# Altium PCB WeatherStation.PcbDoc
Units mil, origin at the board's own origin, x right, y up, seen from the top; angles counter-clockwise.
Board outline 2700 x 2100 mil, 2 copper layers (Top Layer, Bottom Layer); 19 components, 47 nets, 86 pads, 0 vias.
Unrouted connection lines stored in the file: 6.
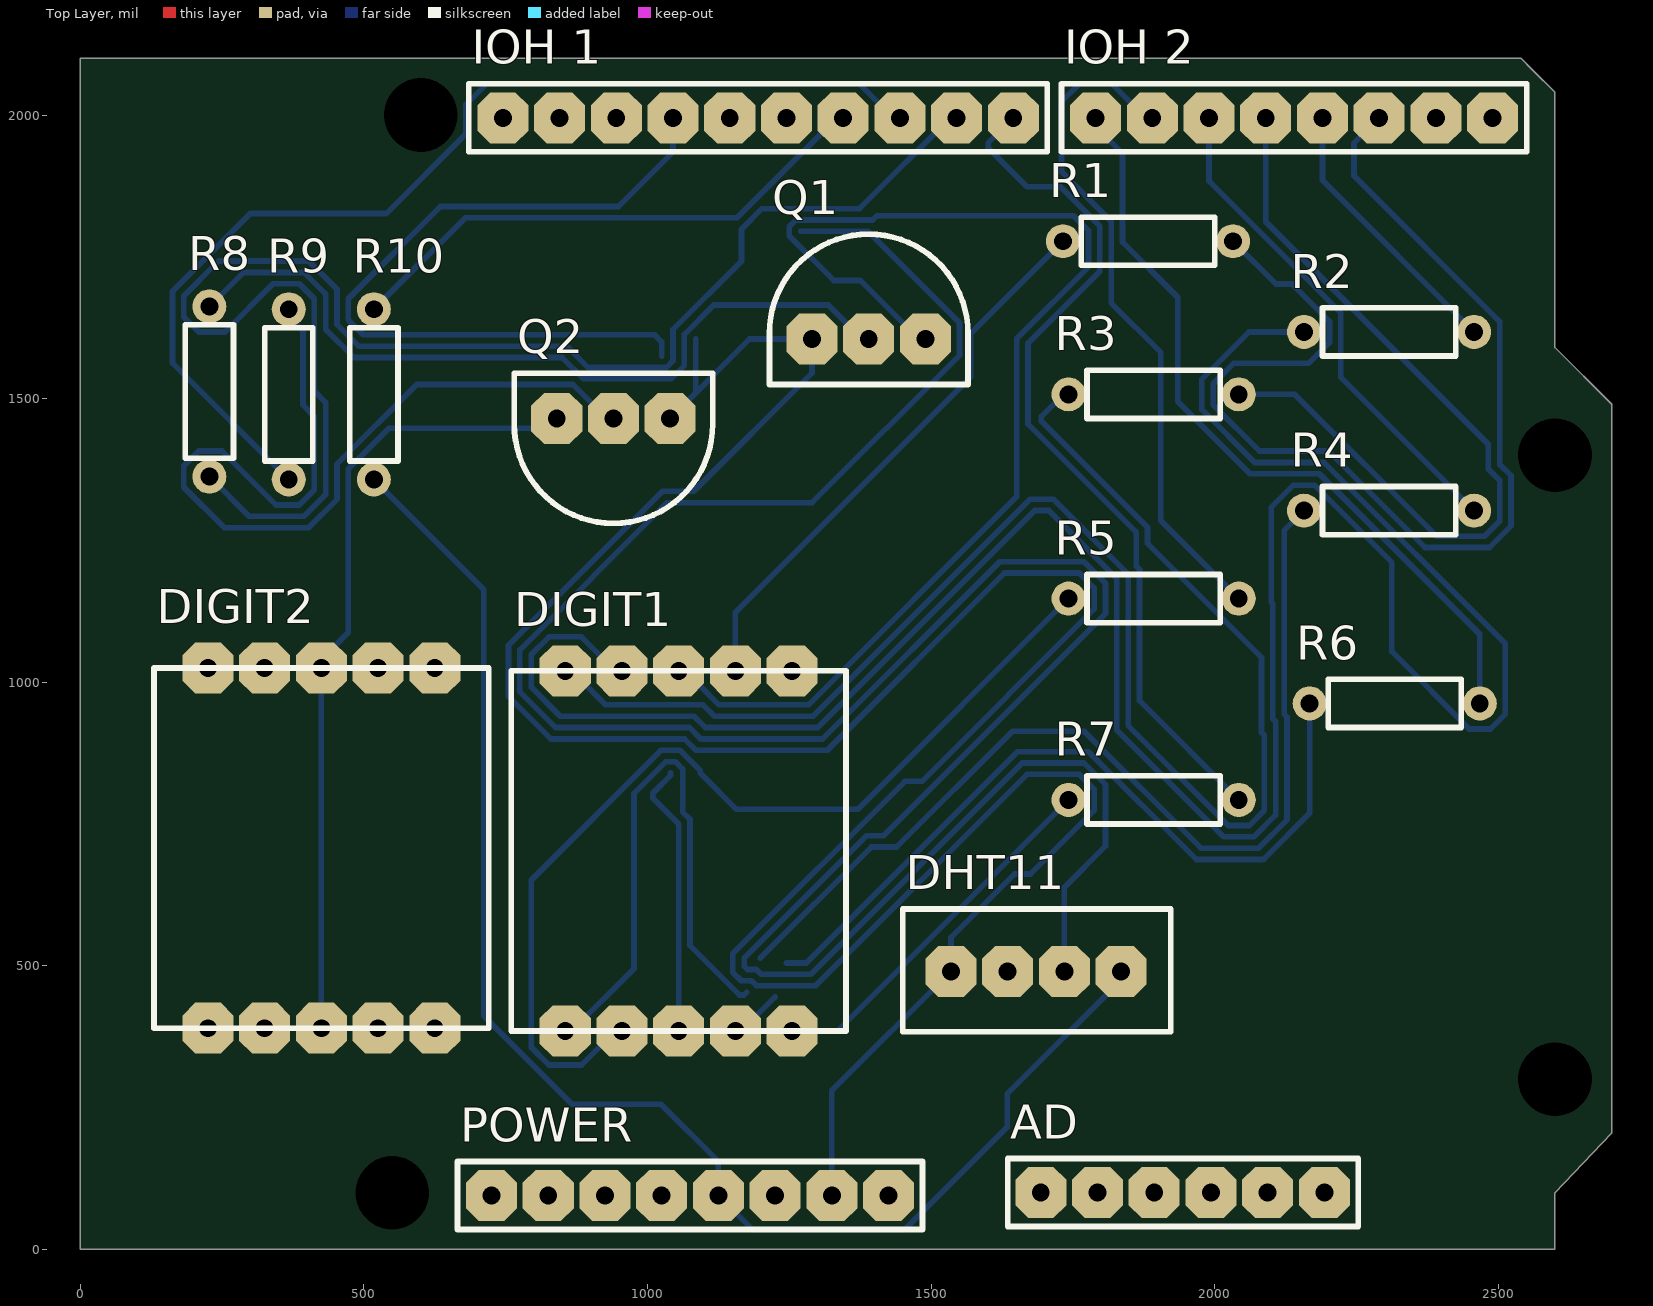
[diagram p0: Top Layer view]
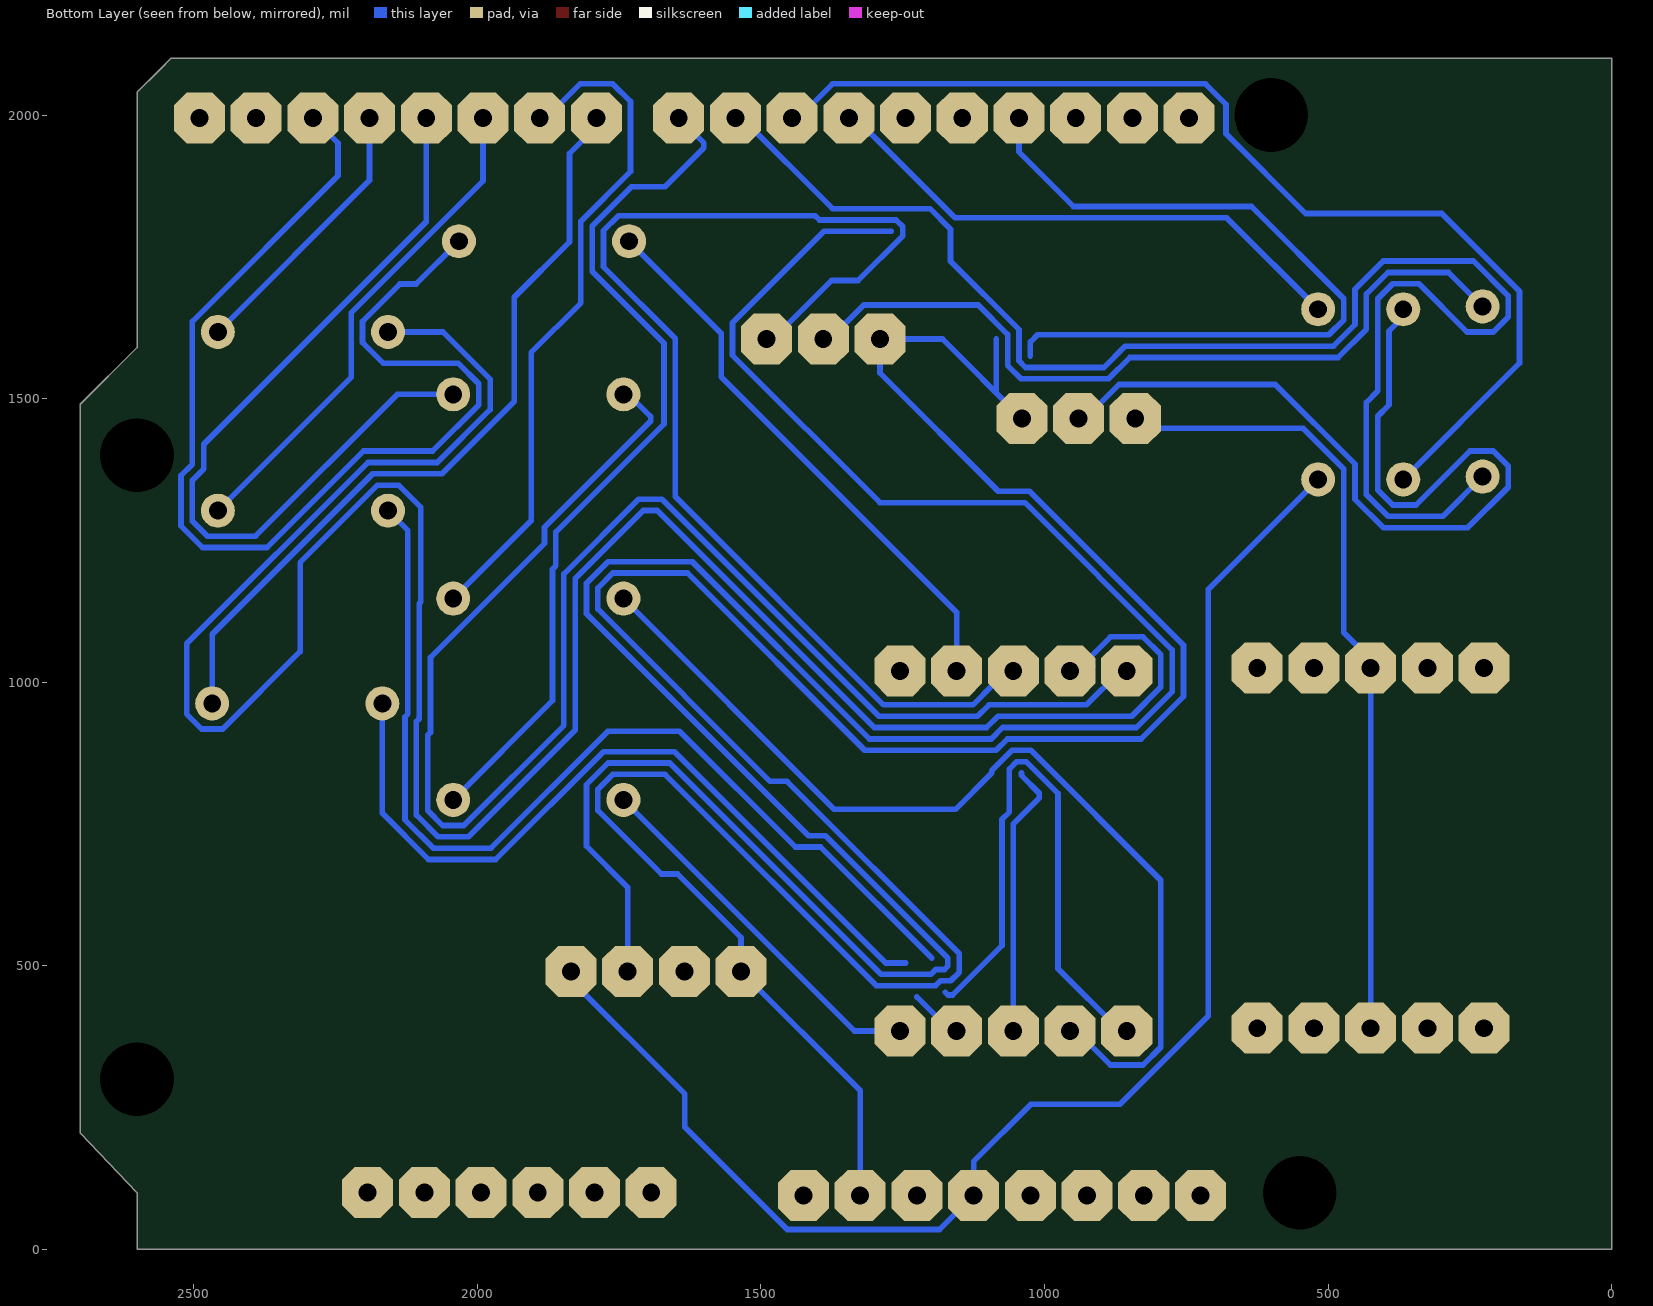
[diagram p1: Bottom Layer view, seen from below]

## Layer stack, top to bottom
Top Solder: solder mask 0.4, Solder Resist, Dk 3.5
Top Layer: signal copper 1.4
Dielectric 1: dielectric 12.6, FR-4, Dk 4.8
Bottom Layer: signal copper 1.4
Bottom Solder: solder mask 0.4, Solder Resist, Dk 3.5

## Board outline
2700,1490 2600,1590 2600,2040 2560,2080 2540,2100 0,2100 0,0 2600,0 2600,100 2700,205

## Design rules (kind name [scope] priority, off if disabled: settings)
Clearance [All] p1: gap=10 ignorepadtopadclearanceinfootprint=FALSE except(0: Arc-Hole Track-Hole SMDPad-Hole THPad-Hole Via-Hole Fill-Hole Poly-Hole Region-Hole Text-Hole)
PolygonConnect [All] p1: connectstyle=Relief reliefconductorwidth=10 reliefentries=4 polygonreliefangle="90 Angle" airgapwidth=10
RoutingVias [All] p1: holewidth=28 width=50 viastyle="Through Hole" minholewidth=28 minwidth=50 maxholewidth=28 maxwidth=50
SolderMaskExpansion [All] p1: expansion=4 istentingtop=FALSE
Width [All] p1: maxlimit=10 minlimit=10 preferedwidth=10
30 further rules are at their usual default settings.

## Classes and differential pairs
component class WeatherStation: AD DIGIT1 DIGIT2 "IOH 1" "IOH 2" POWER Q1 Q2 R1 R2 R3 R4 R5 R6 R7 R8 R9 R10

## Components (designator, comment, footprint, x,y, rotation, side; value= is the part's Value field where it differs from the comment)
AD "AD" AD 1895,100 r90 top
DHT11 "DHT11" DHT11 1685,495 r180 top
DIGIT1 "LTS543R" 7SEGMENT 1060,705 r0 top
DIGIT2 "LTS543R" 7SEGMENT 430,710 r0 top
"IOH 1" "IOH 1" "IOH 1" 1245,1995 r90 top
"IOH 2" "IOH 2" "IOH 2" 2075,2000 r90 top
POWER "POWER" POWER 1005,95 r90 top
Q1 "Transistor" TRANSISTOR 1390,1615 r0 top
Q2 "Transistor" TRANSISTOR 940,1455 r180 top
R1 "Resistor 330" RESISTOR 1885,1775 r180 top
R2 "Resistor 330" RESISTOR 2310,1615 r180 top
R3 "Resistor 330" RESISTOR 1895,1505 r180 top
R4 "Resistor 330" RESISTOR 2310,1300 r180 top
R5 "Resistor 330" RESISTOR 1895,1145 r180 top
R6 "Resistor 330" RESISTOR 2320,960 r180 top
R7 "Resistor 330" RESISTOR 1895,790 r180 top
R8 "Resistor 4.7k" RESISTOR 225,1510 r90 top
R9 "Resistor 4.7k" RESISTOR 365,1505 r90 top
R10 "Resistor 4.7k" RESISTOR 520,1510 r270 top

## Footprints (in the part's own frame and the unit in brackets; to place one, negate y for a bottom-side part, rotate by r counter-clockwise, add the part's x,y. Pads: shape width x height; smd on the part's side, far side on the other; paste and mask are expansions set on the pad)
7SEGMENT [mil]
  oct 90x90 hole 31.5: 1(-205,315) 2(-105,315) 3(-5,315) 4(95,315) 5(195,315) 6(-205,-320) 7(-105,-320) 8(-5,-320) 9(95,-320) 10(195,-320)
  silkscreen extent -300,-320 290,315
AD [mil]
  oct 90x90 hole 31.5: 1(0.33,201.57) 2(0.33,101.57) 3(0.33,1.57) 4(0.33,-98.43) 5(0.33,-198.43) 6(0.33,-298.43)
  silkscreen extent -60,-358 60,260
DHT11 [mil]
  oct 90x90 hole 31.5: 1(-150,5) 2(-50,5) 3(50,5) 4(150,5)
  silkscreen extent -237,-105 235,112
"IOH 1" [mil]
  oct 90x90 hole 31.5: 1(0,-400) 2(0,-300) 3(0,-200) 4(0,-100) 5(0,0) 6(0,100) 7(0,200) 8(0,300) 9(0,400) 10(0,500)
  silkscreen extent -60,-460 60,560
"IOH 2" [mil]
  oct 90x90 hole 31.5: 1(-5,-415) 2(-5,-315) 3(-5,-215) 4(-5,-115) 5(-5,-15) 6(-5,85) 7(-5,185) 8(-5,285)
  silkscreen extent -65,-475 55,345
POWER [mil]
  oct 90x90 hole 31.5: 1(0,-420) 2(0,-320) 3(0,-220) 4(0,-120) 5(0,-20) 6(0,80) 7(0,180) 8(0,280)
  silkscreen extent -60,-480 60,340
RESISTOR [mil]
  round 60 hole 31.5: 1(-147.5,-2.5) 2(152.5,-2.5)
  silkscreen extent -115,-45 120,40
TRANSISTOR [mil]
  oct 90x90 hole 31.5: 5(-100,-10) 6(0,-10) 7(100,-10)
  silkscreen extent -175,-90 175,175

## Free pads (board coordinates)
  round 90 hole 129.92: 1(2600,1400) 2(2600,300) 3(550,100) 4(600,2000)

## Nets (pads, with @x,y where several pads share a name; then routed paths per layer and width w, separated by ;. In a path a pad name is that pad's centre, name@x,y a point inside that pad or via, vN(x,y) a via of type N, cw(c..) or ccw(c..) an arc to the next point about the centre after c; other vN are vias at no path point)
3V3: POWER.5
5V: DHT11.1 POWER.4 R10.2 | length 2572.6
  Bottom Layer w10: R10.2 711.36,1163.64 711.36,411.65 867.36,255.64 1024.36,255.64 1125,155 POWER.4 1185,35 1453.71,35 1634.14,215.43 1634.14,273.71 1835,474.57 DHT11.1
a: DIGIT2.7
AD0: AD.1
AD1: AD.2
AD2: AD.3
AD3: AD.4
AD4: AD.5
AD5: AD.6
AREF: "IOH 1.8"
b: DIGIT2.6
c: DIGIT2.4
d: DIGIT2.2
e: DIGIT2.1
f: DIGIT2.9
g: DIGIT2.10
GND: "IOH 1.7" DHT11.4 POWER.2 POWER.3 Q1.5 Q2.5 | length 6629.2
  Bottom Layer w10: 1025,1575 1025,1600 1012.5,1612.5 498.86,1612.5 472.5,1638.86 472.5,1676.14 635.11,1838.75 948.75,1838.75 1045,1935 1045,1995 ; 1085,1605 1085,1510 Q2.5 1180,1605 Q1.5 1290,1545 1081.64,1336.64 1026.36,1336.64 755,1065.28 755,974.72 829.72,900 1065.53,900 1085.53,880 1316.85,880 1629.35,1192.5 1761.14,1192.5 1787.5,1166.14 1787.5,1128.86 1483.85,825.21 1454.05,825.21 1150.4,521.57 1150.4,488.43 1165.33,473.5 1183.5,473.5 1192,465 1296.57,465 1669.07,837.5 1761.14,837.5 1787.5,811.14 1787.5,773.86 1675.57,661.93 1646.93,661.93 1535,550 DHT11.4 1325,280 POWER.2
IO0: "IOH 2.1"
IO1: "IOH 2.2"
IO2: "IOH 2.3" R1.1 | length 2035.6
  Bottom Layer w10: R1.1 2107.96,1702.04 2136.6,1702.04 2202.5,1636.14 2202.5,1598.86 2166.14,1562.5 2033.86,1562.5 1997.5,1526.14 1997.5,1488.86 2078.86,1407.5 2200.99,1407.5 2370.99,1237.5 2484.42,1237.5 2522.5,1275.58 2522.5,1364.42 2502.5,1384.42 2502.5,1636.14 2245.64,1893 2245.64,1950.64 2290,1995
IO3: "IOH 2.4" R2.1 | length 488.3
  Bottom Layer w10: 2190,1995 2190,1885 R2.1
IO4: "IOH 2.5" R3.1 | length 1456.5
  Bottom Layer w10: R3.1 2141.08,1507.5 2391.08,1257.5 2476.14,1257.5 2502.5,1283.86 2502.5,1356.13 2482.5,1376.13 2482.5,1419.42 2090,1811.92 2090,1995
IO5: "IOH 2.6" R4.1 | length 886.1
  Bottom Layer w10: 1990,1995 1990,1883.64 2222.5,1651.14 2222.5,1537.5 R4.1
IO6: "IOH 2.7" R5.1 | length 1203.5
  Bottom Layer w10: 1890,1995 1878.71,1995 1818.71,2055 1761.29,2055 1730,2023.71 1730,1900.21 1817.5,1812.71 1817.5,1668.86 1905.22,1581.14 1905.22,1284.78 R5.1
IO7: "IOH 2.8" R6.1 | length 1384.7
  Bottom Layer w10: 1790,1995 1790,1979.57 1837.5,1932.07 1837.5,1776.14 1934.9,1678.74 1934.9,1494.9 2062.29,1367.5 2184.42,1367.5 2467.5,1084.42 R6.1
IO8: "IOH 1.1" R7.1 | length 1543.2
  Bottom Layer w10: 1645,1995 1600.64,1950.64 1600.64,1942.36 1669.61,1873.39 1728.53,1873.39 1797.5,1804.42 1797.5,1724.07 1671,1597.57 1671,1455.36 1861.57,1264.79 1861.57,1205.2 1867.5,1199.28 1867.5,967.5 R7.1
IO9: "IOH 1.2" R8.1 | length 2677.4
  Bottom Layer w10: R8.1 297.5,1292.5 394.42,1292.5 432.5,1330.58 432.5,1493.36 412.5,1513.36 412.5,1676.14 386.14,1702.5 340,1702.5 255,1617.5 208.86,1617.5 182.5,1643.86 182.5,1681.14 243.86,1742.5 402.71,1742.5 452.5,1692.71 452.5,1630.58 490.58,1592.5 857.78,1592.5 895.28,1555 1033.28,1555 1045,1566.72 1045,1621.57 1165.75,1742.31 1165.75,1798.75 1202,1835 1373.71,1835 1533.71,1995 1545,1995
IO10: "IOH 1.3" R9.1 | length 1906
  Bottom Layer w10: R9.1 162.5,1562.5 162.5,1689.42 299.61,1826.53 539.61,1826.53 679.96,1966.88 679.96,2018.67 716.29,2055 1373.71,2055 1433.71,1995 1445,1995
IO11: "IOH 1.4" DHT11.2 R10.1 | length 5776.7
  Bottom Layer w10: R10.1 678.75,1818.75 1157.46,1818.75 1333.71,1995 1345,1995 ; 1270,1795 1388.71,1795 1550,1633.71 1550,1576.29 1290.36,1316.64 1034.64,1316.64 775,1057 775,983 838,920 1073.82,920 1093.82,900 1308.57,900 1621.07,1212.5 1769.42,1212.5 1807.5,1174.42 1807.5,1120.58 1416.23,729.3 1386.42,729.3 1170.4,513.28 1170.4,499.36 1176.26,493.5 1191.78,493.5 1200.28,485 1288.28,485 1660.78,857.5 1769.42,857.5 1807.5,819.42 1807.5,710.96 1735,638.46 DHT11.2
IO12: "IOH 1.5"
IO13: "IOH 1.6"
IOREF: POWER.7
NetDIGIT1_1: DIGIT1.1 R3.2 | length 2751.4
  Bottom Layer w10: DIGIT1.1 866.29,1020 926.29,960 1098,960 1118,940 1292,940 1674.64,1322.64 1715.85,1322.64 1847.5,1190.99 1847.5,923.86 2023.86,747.5 2061.14,747.5 2087.5,773.86 2087.5,906.36 2082.5,911.36 2082.5,1043.86 1881.57,1244.79 1881.57,1273.07 1694.46,1460.18 1694.46,1468.47 1733.5,1507.5 R3.2
NetDIGIT1_2: DIGIT1.2 R2.2 | length 4535.7
  Bottom Layer w10: DIGIT1.2 923.28,1020 915,1028.28 919.14,1032.43 919.14,1044.57 883.71,1080 826.29,1080 795,1048.71 795,991.29 846.29,940 1082.1,940 1102.1,920 1300.28,920 1682.92,1302.64 1707.57,1302.64 1827.5,1182.71 1827.5,915.58 2015.58,727.5 2069.42,727.5 2107.5,765.58 2107.5,930.58 2102.5,935.58 2102.5,1138.86 2100,1141.36 2100,1308.64 2138.86,1347.5 2176.14,1347.5 2312.5,1211.14 2312.5,1053.86 2448.86,917.5 2486.14,917.5 2512.5,943.86 2512.5,1067.71 2192.71,1387.5 2070.58,1387.5 1977.5,1480.58 1977.5,1534.42 2060.58,1617.5 R2.2
NetDIGIT1_3: DIGIT1.3 DIGIT1.8 Q1.7 | length 2679.8
  Bottom Layer w10: 1040.68,840 1040.68,835.68 1009.14,804.14 1009.14,795.86 1055,750 DIGIT1.8 ; DIGIT1.3 1095,1020 1090.86,1015.86 1090.86,995.43 1126.29,960 1283.71,960 1651,1327.29 1651,1605.85 1777.5,1732.35 1777.5,1796.14 1751.14,1822.5 1404.5,1822.5 1397,1815 1261.72,1815 1250,1803.28 1250,1786.72 1328.57,1708.14 1375.57,1708.14 1478.71,1605 Q1.7
NetDIGIT1_4: DIGIT1.4 R1.2 | length 996.7
  Bottom Layer w10: DIGIT1.4 1155,1123.24 1570,1538.24 1570,1615 R1.2
NetDIGIT1_6: DIGIT1.6 R4.2 | length 2807.3
  Bottom Layer w10: DIGIT1.6 866.29,385 976.11,494.82 976.11,803.71 1032.4,860 1048.97,860 1061.98,846.98 1061.98,771.3 1075,758.28 1075,535.55 1161.99,448.56 1170.27,448.56 1175.21,453.5 ; 1198.9,513.5 1394.71,709.3 1439.3,709.3 1643.61,913.61 1769.88,913.61 1975.99,707.5 2077.71,707.5 2127.5,757.29 2127.5,938.86 2122.5,943.86 2122.5,1267.5 R4.2
NetDIGIT1_7: DIGIT1.7 R5.2 | length 1734.4
  Bottom Layer w10: DIGIT1.7 943.71,385 883.71,325 826.29,325 795,356.29 795,650.89 1024.11,880 1057.25,880 1092.93,844.32 1092.93,840 1157.11,775.82 1370.82,775.82 R5.2
NetDIGIT1_9: DIGIT1.9 R6.2 | length 1477.6
  Bottom Layer w10: DIGIT1.9 1165,385 1225,445 ; 1245,505 1280,505 1652.5,877.5 1777.71,877.5 1967.71,687.5 2085.99,687.5 2167.5,769.01 R6.2
NetDIGIT1_10: DIGIT1.10 R7.2 | length 656.3
  Bottom Layer w10: DIGIT1.10 1335,385 R7.2
NetDIGIT2_3: DIGIT2.3 DIGIT2.8 Q2.7 | length 1410.1
  Bottom Layer w10: DIGIT2.8 425,1040.43 472.5,1087.93 472.5,1376.14 543.86,1447.5 822.5,1447.5 Q2.7
NetQ1_6: Q1.6 R8.2 | length 1412.2
  Bottom Layer w10: R8.2 287.5,1722.5 394.42,1722.5 432.5,1684.42 432.5,1622.29 482.29,1572.5 849.5,1572.5 887,1535 1041.57,1535 1065,1558.43 1065,1613.28 1116.72,1665 1318.71,1665 1378.71,1605 Q1.6
NetQ2_6: Q2.6 R9.2 | length 1618.6
  Bottom Layer w10: R9.2 367.5,1643.97 392.5,1618.97 392.5,1488.92 412.5,1468.92 412.5,1338.86 386.14,1312.5 345,1312.5 250,1407.5 208.86,1407.5 182.5,1381.14 182.5,1343.86 253.86,1272.5 402.71,1272.5 452.5,1322.29 452.5,1384.42 593.08,1525 868.71,1525 928.71,1465 Q2.6
RESET: POWER.6
SCL: "IOH 1.10"
SDA: "IOH 1.9"
Vin: POWER.1
pads on no net: DHT11.3 DIGIT1.5 DIGIT2.5 POWER.8